# Altium PCB HS-IO-BaseBoard.PcbDoc (part 2 of 4)
Units mm, origin at the board's own origin, x right, y up, seen from the top; angles counter-clockwise.
Board outline 157.7 x 86.4 mm, 6 copper layers (Top Layer, MidLayer1, InternalPlane1, InternalPlane2, MidLayer2, Bottom Layer); 214 components, 240 nets, 782 pads, 260 vias.
Unrouted connection lines stored in the file: 101.
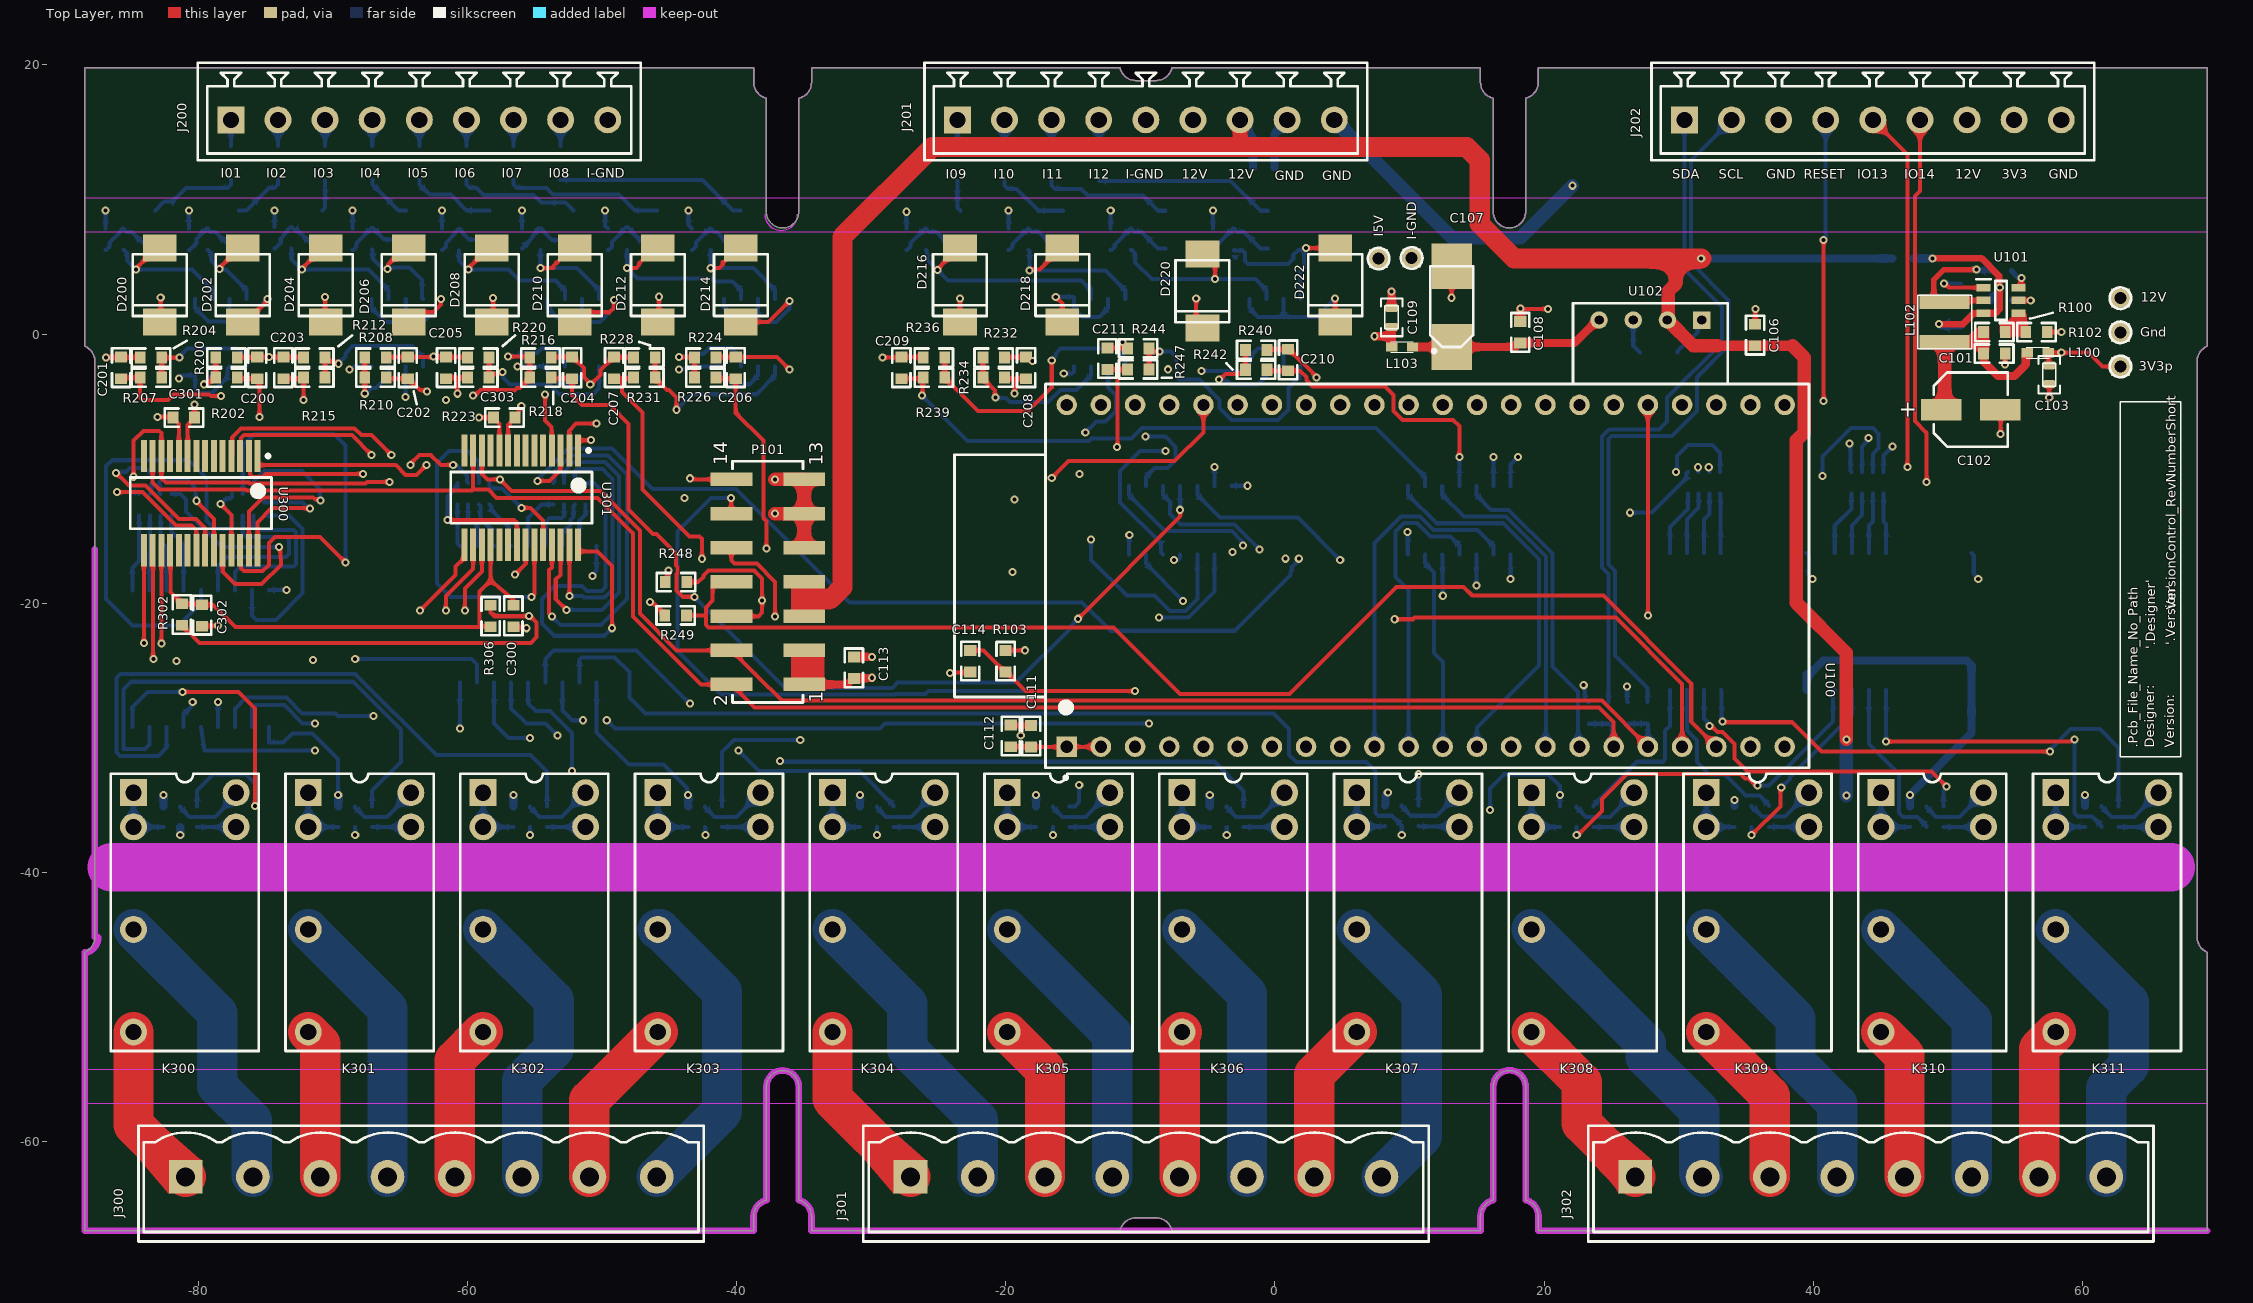
[diagram p0: Top Layer view]

## Via types
v1: diameter 0.6, hole 0.3, Top Layer to Bottom Layer, 260 vias

## Nets (pads, with @x,y where several pads share a name; then routed paths per layer and width w, separated by ;. In a path a pad name is that pad's centre, name@x,y a point inside that pad or via, vN(x,y) a via of type N, cw(c..) or ccw(c..) an arc to the next point about the centre after c; other vN are vias at no path point) (continued)
"-K5 Reset": (continued)
  MidLayer1 w0.3: v1(-52.234,-32.471) -30.595,-32.471 -29.579,-33.487 v1(-29.579,-37.208)
  Bottom Layer w0.3: V302.14@-55.479,-25.896 -55.479,-27.438 -54.901,-28.016 -53.862,-28.016 -52.234,-29.644 v1(-52.234,-32.471) ; v1(-29.579,-37.208) L316.1@-29.579,-36.633
"-K5 Set": L314.1 V300.14 | length 54.7
  MidLayer1 w0.3: v1(-71.31,-30.921) v1(-39.864,-30.921)
  Bottom Layer w0.3: V300.14@-79.804,-29.188 -79.525,-30.921 v1(-71.31,-30.921) ; v1(-39.864,-30.921) -38.315,-32.471 -30.867,-32.471 -28.329,-35.008 L314.1@-28.329,-35.083
"-K6 Reset": L317.1 V302.13 | length 50.1
  MidLayer1 w0.3: v1(-43.446,-27.436) -37.283,-27.436 -36.033,-28.686 -17.999,-28.686 -16.582,-30.104 -16.582,-37.126 v1(-16.499,-37.208)
  Bottom Layer w0.3: V302.13@-54.209,-25.896 -54.209,-24.129 -53.588,-23.508 -47.43,-23.508 -43.502,-27.436 v1(-43.446,-27.436) ; v1(-16.499,-37.208) L317.1@-16.499,-36.633
"-K6 Set": L315.1 V300.13 | length 74.2
  MidLayer1 w0.3: v1(-78.534,-27.328) -78.534,-27.238 -77.717,-26.421 -37.591,-26.421 -35.826,-28.186 -15.459,-28.186 -14.197,-29.448 -14.197,-33.061 -14.541,-33.405 v1(-14.541,-33.487)
  Bottom Layer w0.3: V300.13@-78.534,-29.188 v1(-78.534,-27.328) ; L315.1@-15.249,-35.083 -14.871,-35.083 -14.541,-34.753 v1(-14.541,-33.487)
"-K7 Reset": L322.1 V302.12 | length 59.1
  MidLayer1 w0.3: v1(-51.421,-28.686) v1(-49.643,-28.686)
  MidLayer2 w0.3: v1(-9.359,-28.928) -9.278,-29.01 -9.278,-30.803 -7.58,-32.501 -5.04,-32.501 -3.579,-33.961 v1(-3.579,-37.208)
  Bottom Layer w0.3: V302.12@-52.939,-25.896 -52.939,-27.959 -52.212,-28.686 v1(-51.421,-28.686) ; v1(-49.643,-28.686) -49.028,-29.302 -29.337,-29.302 -28.963,-28.928 v1(-9.359,-28.928) ; v1(-3.579,-37.208) L322.1@-3.579,-36.633
"-K7 Set": L320.1 V300.12 | length 81.6
  MidLayer1 w0.3: v1(-66.981,-28.364) -65.236,-30.109 -58.025,-30.109 -56.933,-29.016 -52.602,-29.016 -52.182,-29.436 -39.048,-29.436 v1(-36.766,-31.718)
  Bottom Layer w0.3: V300.12@-77.264,-29.188 -77.264,-27.834 -76.44,-27.01 -73.446,-27.01 -72.285,-28.171 -69.797,-28.171 -69.604,-28.364 v1(-66.981,-28.364) ; v1(-36.766,-31.718) -36.714,-31.77 -4.492,-31.77 -2.329,-33.933 L320.1@-2.329,-35.083
"-K8 Reset": L323.1 V302.11 | length 72.8
  Bottom Layer w0.3: V302.11@-51.669,-25.896 -51.669,-24.184 -51.493,-24.008 -49.063,-24.008 -47.967,-25.105 -47.967,-26.984 -46.765,-28.186 -23.444,-28.186 -23.435,-28.178 -0.114,-28.178 1.055,-29.347 1.055,-31.252 1.588,-31.785 6.814,-31.785 7.471,-32.442 7.471,-35.578 7.676,-35.783 8.711,-35.783 9.421,-36.493 v1(9.421,-37.208)
"-K8 Set": L321.1 V300.11 | length 106.2
  MidLayer1 w0.3: v1(-71.462,-24.216) -69.746,-22.5 9.017,-22.5 11.063,-24.546 11.063,-32.308 v1(10.671,-32.699)
  MidLayer2 w0.3: v1(-71.462,-24.216) -71.386,-24.292 -71.386,-28.845 v1(-71.31,-28.921)
  Bottom Layer w0.3: V300.11@-75.994,-29.188 -75.994,-27.797 -75.765,-27.568 -73.595,-27.568 -72.242,-28.921 v1(-71.31,-28.921) ; L321.1@10.671,-35.008 v1(10.671,-32.699)
"-K9 Reset": L328.1 V303.18 | length 26.7
  Top Layer w0.3: v1(22.421,-37.208) 22.521,-37.208 24.301,-35.428 24.301,-34.541 26.159,-32.683 34.598,-32.683 34.928,-33.014 35.2,-33.014 35.72,-33.533 v1(35.855,-33.533)
  Bottom Layer w0.3: v1(22.421,-37.208) L328.1@22.421,-36.633 ; v1(35.855,-33.533) 36.701,-33.533 41.459,-28.776 41.459,-26.571 V303.18@41.591,-26.438
"-K9 Set": L326.1 V301.18 | length 12.1
  Bottom Layer w0.3: L326.1@23.671,-35.083 23.671,-35.008 23.871,-34.808 26.909,-31.77 28.812,-31.77 28.988,-31.595 28.988,-29.466 29.34,-29.115 V301.18@29.341,-26.438
"-K10 Reset": L329.1 V303.17 | length 14.5
  Top Layer w0.3: v1(35.421,-37.208) 37.546,-35.083 37.546,-33.749 v1(37.616,-33.679)
  Bottom Layer w0.3: v1(35.421,-37.208) L329.1@35.421,-36.608 ; v1(37.616,-33.679) 38.253,-33.042 38.253,-32.901 42.861,-28.293 V303.17@42.861,-26.438
"-K10 Set": L327.1 V301.17 | length 12.4
  Bottom Layer w0.3: V301.17@30.611,-26.438 30.611,-29.436 31.373,-30.198 31.373,-31.799 32.292,-32.718 33.438,-32.718 34.801,-34.082 34.801,-34.108 34.977,-34.283 35.991,-34.283 36.691,-34.983 L327.1@36.691,-35.058
"-K11 Reset": L334.1 V303.16 | length 12.6
  Bottom Layer w0.3: V303.16@44.131,-26.438 44.131,-30.436 46.378,-32.683 46.378,-35.561 46.676,-35.858 47.721,-35.858 48.421,-36.558 L334.1@48.421,-36.633
"-K11 Set": L332.1 V301.16 | length 24.5
  Top Layer w0.3: v1(32.295,-29.102) 32.43,-29.102 32.874,-29.546 33.251,-29.546 34.151,-30.446 34.151,-31.529 35.111,-32.49 48.777,-32.49 v1(49.896,-33.608)
  Bottom Layer w0.3: V301.16@31.881,-26.438 31.881,-28.553 32.295,-28.967 v1(32.295,-29.102) ; L332.1@49.671,-35.083 49.671,-33.915 49.896,-33.69 v1(49.896,-33.608)
"-K12 Reset": L335.1 V303.15 | length 25.9
  Top Layer w0.3: v1(45.401,-30.268) 59.114,-30.268 59.281,-30.102 v1(59.416,-30.102)
  Bottom Layer w0.3: v1(45.401,-30.268) V303.15@45.401,-26.438 ; v1(59.416,-30.102) 59.416,-35.573 59.676,-35.833 60.721,-35.833 61.421,-36.533 L335.1@61.421,-36.608
"-K12 Set": L333.1 V301.15 | length 38.4
  Top Layer w0.3: v1(33.237,-28.766) 33.305,-28.835 38.425,-28.835 40.609,-31.018 v1(57.571,-31.018)
  Bottom Layer w0.3: V301.15@33.151,-26.438 33.194,-26.481 33.194,-28.723 v1(33.237,-28.766) ; v1(57.571,-31.018) 57.571,-30.887 59.105,-29.352 61.29,-29.352 62.671,-30.733 L333.1@62.671,-35.083